# EAGLE board PGA-103+ LNA (EAGLE 7.7.0)
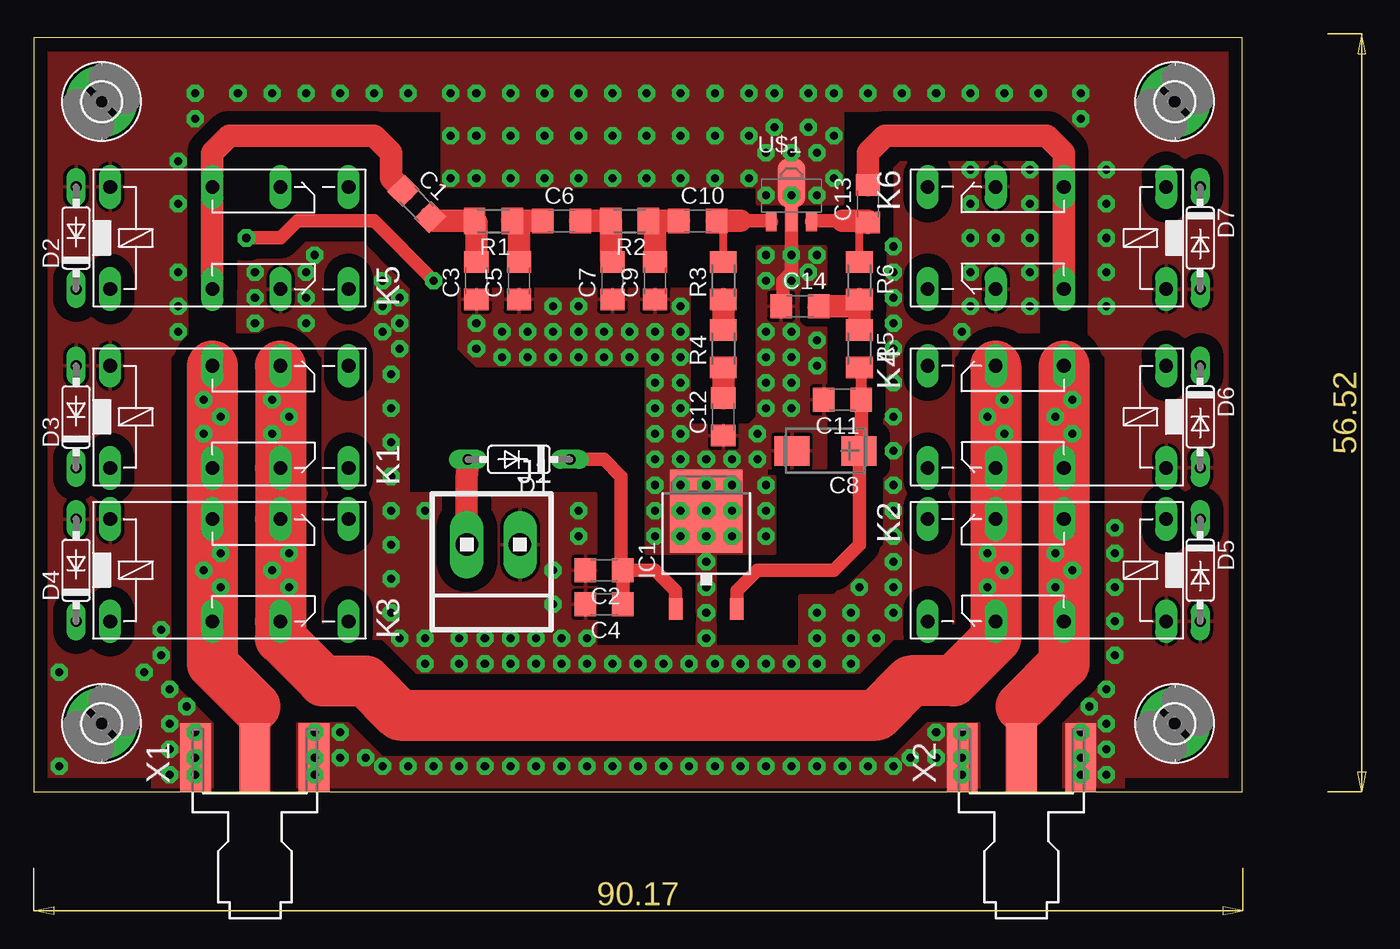
[diagram p0: board, top side]
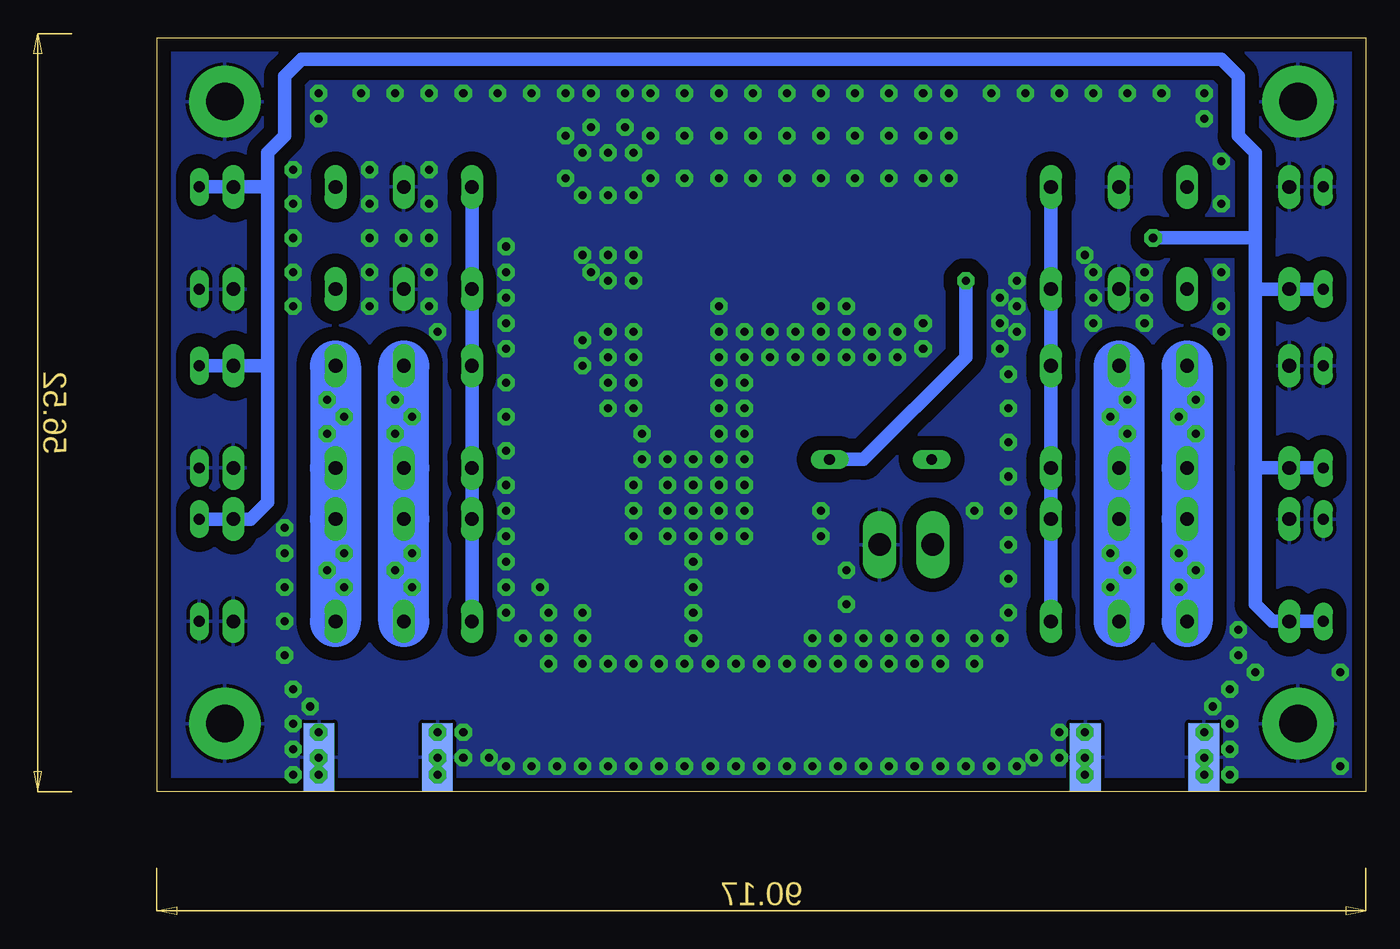
[diagram p1: board, bottom side, seen from below]

Size 90.15 x 56.19 mm. Coordinates in mm from the lower left corner, seen from the top.
Outline: 0,0 90.15,0 90.15,56.19 0,56.19 0,0
Copper layers (1*16): Top 0.035mm / dielectric 1.5mm / Bottom 0.035mm
Design rules "SparkFun": minimum track width 8mil, minimum drill 20mil, track to track 8mil, track to pad 8mil, pad to pad 8mil, via to via 8mil, smd to smd 8mil, copper to edge 10mil, drill to drill 8mil, minimum pad ring 12mil, minimum via ring 10mil, stop-mask expansion 4mil, vias tented up to drill 25mil, thermal gap 10mil

## Footprints (pad centres in the part's own frame; a part is rotated, then mirrored left to right if it is on the bottom)
C1206 = smd 1.6 x 1.8: 1 -1.4,0; 2 1.4,0
CT6032 = smd 2.6 x 2.2: + -2.5,0; - 2.5,0
DO35-7 = drill 0.813 long: A 3.81,0; C -3.81,0
2,8-PAD = drill 2.8 pad 5.334: B2,8 0,0
TO252 = smd 1 x 1.6: 1 -2.28,-4.8; 2 2.28,-4.8 | smd 5.4 x 6.2: 3 0,2.5
1X2MTA = drill 1.676 long: 1 1.981,0; 2 -1.981,0
351 = drill 1.016 long: 1 -3.81,-3.81; 16 -3.81,3.81; O1 8.89,-3.81; O2 8.89,3.81; P1 3.81,-3.81; P2 3.81,3.81; S1 13.97,-3.81; S2 13.97,3.81
M1206 = smd 1.6 x 2: 1 -1.4,0; 2 1.4,0
DF782 = smd 0.8 x 1.9: GND-1 0,-1.727 | smd 2.032 x 3.65: GND-2 0,0.94 | smd 0.8 x 1.4: RF-IN -1.499,-1.981; RF-OUT 1.499,-1.981
J502-ND-142-0701-851/861 = smd 5.08 x 2.286: 1 2.565,0; G@1 2.565,4.42; G@2 2.565,-4.42 | smd 5.08 x 2.286 bottom: G@3 2.565,4.42; G@4 2.565,-4.42

## Placement (x,y rotation side)
C1  10n  [C1206]  28.57,43.81 315 top
C2  1n  [C1206]  42.55,16.51 180 top
C3  330p  [C1206]  33.02,38.1 90 top
C4  1n  [C1206]  42.55,13.97 180 top
C5  330p  [C1206]  36.2,38.1 90 top
C6  10n  [C1206]  39.37,42.55 0 top
C7  330p  [C1206]  43.18,38.1 90 top
C8  10u  [CT6032]  59.05,25.4 180 top
C9  330p  [C1206]  46.35,38.1 90 top
C10  10n  [C1206]  49.53,42.55 0 top
C11  1n  [C1206]  60.33,29.21 180 top
C12  330p  [C1206]  51.44,27.94 90 top
C13  10n  [C1206]  62.23,43.81 90 top
C14  1n  [C1206]  57.15,36.2 0 top
D1  1N4xxx  [DO35-7]  36.2,24.77 180 top
D2  1N4xxx  [DO35-7]  3.17,41.27 90 top
D3  1N4xxx  [DO35-7]  3.17,27.94 90 top
D4  1N4xxx  [DO35-7]  3.17,16.51 90 top
D5  1N4xxx  [DO35-7]  87,16.51 270 top
D6  1N4xxx  [DO35-7]  87,27.94 270 top
D7  1N4xxx  [DO35-7]  87,41.27 270 top
H1  MOUNT-PAD  [2,8-PAD]  5.08,5.08 0 top
H2  MOUNT-PAD  [2,8-PAD]  85.09,5.08 0 top
H3  MOUNT-PAD  [2,8-PAD]  5.08,51.44 0 top
H4  MOUNT-PAD  [2,8-PAD]  85.09,51.44 0 top
IC1  7805DT  [TO252]  50.16,18.41 0 top
J1  [1X2MTA]  34.29,18.41 180 top
K1  351  [351]  9.53,27.94 0 top
K2  351  [351]  80.64,16.51 180 top
K3  351  [351]  9.53,16.51 0 top
K4  351  [351]  80.64,27.94 180 top
K5  351  [351]  9.53,41.27 0 top
K6  351  [351]  80.64,41.27 180 top
R1  1u  [M1206]  34.29,42.55 180 top
R2  1u  [M1206]  44.45,42.55 180 top
R3  1u  [M1206]  51.44,38.1 90 top
R4  150  [M1206]  51.44,33.02 90 top
R5  22  [M1206]  61.59,33.02 270 top
R6  1u  [M1206]  61.59,38.1 270 top
U$1  PGA-103  [DF782]  56.52,44.45 0 top
X1  SMA  [J502-ND-142-0701-851/861]  16.51,0 90 top
X2  SMA  [J502-ND-142-0701-851/861]  73.66,0 90 top

## Library data of the parts
C1-C14 R1-R6 = rcl
D1-D7 = diode
H1-H4 = holes
IC1 = linear
J1 = con-amp
K1-K6 = relay; OC_FARNELL: unknown; OC_NEWARK: unknown
U$1 = minicircuits
X1 X2 = con-coax; MF: JOHNSON COMPONENTS; MPN: 142-0701-851; OC_FARNELL: 1019325; OC_NEWARK: 99F6798

## Nets
ANT: K1.P1 K1.P2 K3.P1 K3.P2 X1.1
GND: C2.2 C3.1 C4.2 C5.1 C7.1 C8.- C9.1 C11.2 C12.1 C14.1 D2.A D3.A D4.A D5.A D6.A D7.A H1.B2,8 H2.B2,8 H3.B2,8 H4.B2,8 IC1.3 J1.2 K1.16 K2.16 K3.16 K4.16 K5.16 K5.O1 K5.O2 K6.16 K6.O1 K6.O2 U$1.GND-1 U$1.GND-2 X1.G@1 X1.G@2 X1.G@3 X1.G@4 X2.G@1 X2.G@2 X2.G@3 X2.G@4
LNA_IN: C1.1 K5.P1 K5.P2
LNA_OUT: C13.2 K6.P1 K6.P2
N$1: C10.2 R3.2 U$1.RF-IN
N$3: C13.1 R6.1 U$1.RF-OUT
N$5: C8.+ C11.1 IC1.2 R5.2
N$7: D1.A J1.1
N$8: C9.2 C10.1 R2.1
N$9: C14.2 R5.1 R6.2
N$10: R3.1 R4.2
N$11: C12.2 R4.1
N$12: C6.2 C7.2 R2.2
N$13: C5.2 C6.1 R1.1
N$14: C1.2 C3.2 R1.2
N$16: K1.S1 K1.S2 K3.S1 K3.S2 K5.S1 K5.S2
N$17: K2.S1 K2.S2 K4.S1 K4.S2 K6.S1 K6.S2
RF_BYPASS: K1.O1 K1.O2 K2.O1 K2.O2 K3.O1 K3.O2 K4.O1 K4.O2
TRX: K2.P1 K2.P2 K4.P1 K4.P2 X2.1
VCC: C2.1 C4.1 D1.C D2.C D3.C D4.C D5.C D6.C D7.C IC1.1 K1.1 K2.1 K3.1 K4.1 K5.1 K6.1

## Tracks (layer width: path | path; a pad name or v marks a point on that pad's centre or on a via)
ANT  (via drill 0.6 pad 1.27)
  Top 2.184: 16.51,6.35 X1.1
  Top 3.81: K1.P2 K1.P1 K3.P2 K3.P1 13.34,9.53 16.51,6.35
  Bottom 1.016: K1.P2 v12.7,29.21 v13.97,27.94 v12.7,26.67 | K3.P2 v13.97,17.78 v12.7,16.51 v13.97,15.24
  Bottom 3.81: K1.P2 K1.P1 K3.P2 K3.P1
GND  (via drill 0.6 pad 1.27)
  Top 1.016: U$1.GND-2 U$1.GND-1 56.52,38.73 55.88,38.1 55.88,36.96 C14.1
  other vias: 29.21,20.95 22.86,4.45 22.86,2.54 24.77,2.54 26.04,1.91 27.94,1.91 29.84,1.91 31.75,1.91 33.66,1.91 35.56,1.91 37.47,1.91 39.37,1.91 41.27,1.91 43.18,1.91 45.09,1.91 46.99,1.91 48.9,1.91 50.8,1.91 52.7,1.91 54.61,1.91 56.52,1.91 58.42,1.91 60.33,1.91 62.23,1.91 64.14,1.91 67.31,4.45 67.31,2.54 65.41,2.54 11.43,6.35 10.16,5.08 10.16,3.17 10.16,1.27 78.74,6.35 80.01,5.08 80.01,3.17 80.01,1.27 80.01,7.62 10.16,7.62 1.91,8.89 8.26,8.89 9.53,10.16 1.91,1.91 26.67,20.95 26.67,18.41 26.67,15.88 26.67,13.34 27.3,11.43 29.21,9.53 31.75,9.53 33.66,9.53 35.56,9.53 37.47,9.53 39.37,9.53 41.27,9.53 43.18,9.53 45.09,9.53 46.99,9.53 48.9,9.53 50.8,9.53 52.7,9.53 54.61,9.53 56.52,9.53 58.42,9.53 60.96,9.53 62.87,11.43 64.14,13.34 58.42,13.34 60.96,13.34 50.16,11.43 50.16,13.34 50.16,17.14 48.26,19.05 52.07,19.05 52.07,20.95 48.26,20.95 50.16,19.05 48.26,22.86 52.07,22.86 50.16,22.86 50.16,20.95 40.64,20.95 40.64,19.05 41.27,11.43 38.73,13.97 38.73,16.51 50.16,24.77 56.52,30.48 56.52,32.38 54.61,20.95 54.61,19.05 38.73,34.29 40.64,34.29 42.55,34.29 44.45,34.29 46.35,34.29 48.26,34.29 42.55,32.38 44.45,32.38 46.35,32.38 48.26,32.38 38.73,36.2 40.64,36.2 38.73,32.38 40.64,32.38 54.61,40.01 56.52,40.01 54.61,34.29 58.42,33.66 58.42,31.75 54.61,32.38 56.52,34.29 54.61,30.48 33.02,45.72 35.56,45.72 38.1,45.72 40.64,45.72 43.18,45.72 45.72,45.72 48.26,45.72 50.8,45.72 53.34,45.72 54.61,44.45 58.42,44.45 58.42,47.62 54.61,47.62 59.69,45.72 57.78,52.07 59.69,52.07 62.23,52.07 64.77,52.07 67.31,52.07 69.85,52.07 72.39,52.07 74.93,52.07 78.11,52.07 80.01,46.35 80.01,43.81 80.01,41.27 80.01,38.73 80.01,36.2 78.11,50.16 80.64,10.16 80.64,12.7 80.64,15.24 80.64,17.78 80.64,19.68 9.53,12.06 10.79,34.29 10.79,36.2 10.79,38.73 10.79,43.81 10.79,46.99 12.06,50.16 12.06,52.07 15.24,52.07 17.78,52.07 20.32,52.07 22.86,52.07 25.4,52.07 27.94,52.07 31.11,52.07 31.11,48.9 33.02,48.9 35.56,48.9 38.1,48.9 40.64,48.9 43.18,48.9 45.72,48.9 48.26,48.9 50.8,48.9 53.34,48.9 55.24,49.53 57.78,49.53 59.69,48.9 56.52,47.62 56.52,44.45 36.83,34.29 36.83,32.38 34.92,34.29 34.92,32.38 48.26,26.67 48.26,30.48 48.26,28.57 46.35,28.57 46.35,30.48 46.35,26.67 46.35,22.86 46.35,20.95 31.75,11.43 33.66,11.43 35.56,11.43 37.47,11.43 39.37,11.43 29.21,11.43 58.42,11.43 60.96,11.43 58.42,40.01 56.52,28.57 54.61,28.57 54.61,38.1 56.52,38.1 57.78,38.73 12.06,4.45 12.06,2.54 12.06,1.27 20.95,1.27 20.95,2.54 20.95,4.45 78.11,4.45 69.22,4.45 69.22,2.54 78.11,2.54 78.11,1.27 69.22,1.27 33.02,34.92 33.02,33.02 31.11,45.72 26.67,23.5 26.67,26.04 26.67,28.57 26.67,31.11 27.3,33.02 27.3,34.92 16.51,34.92 20.32,34.92 20.32,38.73 20.32,36.83 16.51,38.73 16.51,36.83 64.14,15.24 64.14,17.14 61.59,15.24 74.3,46.35 74.3,43.81 74.3,41.27 74.3,38.73 74.3,36.2 69.85,36.2 69.85,38.73 69.85,41.27 71.75,41.27 69.85,43.81 69.85,46.35 64.14,19.05 64.14,20.95 64.14,22.86 64.14,27.94 64.14,30.48 64.14,33.02 64.14,34.92 64.14,36.83 64.14,38.73 64.14,25.4 33.02,52.07 35.56,52.07 38.1,52.07 40.64,52.07 43.18,52.07 45.72,52.07 48.26,52.07 50.8,52.07 53.34,52.07 55.24,52.07 48.26,36.2 48.26,24.77 46.35,24.77 54.61,22.86 52.07,24.77 53.98,24.77 53.98,26.67 64.14,40.64 69.22,34.29 26.04,36.2 26.04,34.29 20.95,40.01 26.04,38.1 27.3,36.83 46.35,19.05 50.16,15.24
  pour Bottom (isolate 1.016): 0,55.88 90.17,55.88 90.17,0 0,0
  pour Top (isolate 1.016): 0,0 10.16,0 10.16,32.38 11.43,33.66 11.43,48.26 13.97,50.8 76.2,50.8 78.74,48.26 78.74,33.66 80.01,32.38 80.01,0 90.17,0 90.17,55.88 0,55.88
  pour Top (isolate 1.016): 15.24,41.91 23.5,41.91 27.94,37.47 27.94,22.23 41.91,22.23 41.91,10.79 49.53,10.79 49.53,15.24 50.8,15.24 50.8,10.79 57.15,10.79 57.15,14.61 59.69,14.61 63.5,18.41 63.5,40.64 64.14,41.27 64.14,46.35 64.77,46.99 74.3,46.99 74.93,46.35 74.93,34.29 70.48,34.29 68.58,32.38 68.58,12.06 67.94,11.43 64.14,11.43 61.59,8.89 28.57,8.89 26.04,11.43 22.23,11.43 21.59,12.06 21.59,32.38 19.68,34.29 15.24,34.29
  pour Top (no thermals): 30.48,45.09 53.98,45.09 53.98,43.81 60.33,43.81 60.33,50.8 30.48,50.8
  pour Top (isolate 0.61): 53.98,40.64 59.05,40.64 59.05,24.13 45.72,24.13 45.72,31.75 33.02,31.75 31.75,33.02 31.75,37.47 48.9,37.47 48.9,27.3 53.34,27.3 53.98,27.94
  pour Top (no thermals): 45.72,24.13 54.61,24.13 54.61,23.5 55.24,23.5 55.24,17.78 50.8,17.78 50.8,13.34 49.53,13.34 49.53,17.78 45.72,17.78
  pour Top (no thermals): 19.68,5.08 23.5,5.08 26.04,2.54 64.14,2.54 66.67,5.08 70.48,5.08 70.48,0 19.68,0
  pour Top (no thermals): 76.83,5.08 80.01,8.26 81.28,8.26 81.28,0 76.83,0
  pour Top (no thermals): 13.34,0 13.34,5.08 10.16,8.26 8.89,8.26 8.89,0
LNA_IN
  Top 1.676: K5.P1 K5.P2 13.34,47.62 14.61,48.9 25.4,48.9 26.67,47.62 26.67,45.72 C1.1
LNA_OUT
  Top 1.676: 76.83,36.83 K6.P2 K6.P1 76.83,46.99 76.83,47.62 75.56,48.9 63.5,48.9 62.23,47.62 C13.2
N$1
  Top 0.61: R3.2 51.44,42.55
  Top 1.016: 52.7,42.55 54.94,42.55 U$1.RF-IN
  Top 1.676: C10.2 51.44,42.55 52.7,42.55
N$3
  Top 0.61: R6.1 61.59,42.55
  Top 1.016: 60.33,42.55 58.09,42.55 U$1.RF-OUT
  Top 1.676: C13.1 62.23,42.55 61.59,42.55 60.33,42.55
N$5
  Top 0.813: C11.1 61.73,31.49 R5.2
  Top 1.016: IC1.2 52.45,14.98 53.98,16.51 59.69,16.51 61.59,18.41 61.59,25.36 C8.+ 61.73,25.57 C11.1
N$7
  Top 0.61: 32.38,24.13 D1.A
  Top 1.016: 32.31,24.69 D1.A
  Top 1.676: J1.1 32.31,23.42 32.38,24.13
N$8
  Top 1.676: R2.1 46.35,42.55 | 46.35,42.55 C10.1 | C9.2 46.35,42.55
N$9
  Top 1.676: R6.2 61.59,36.2 | 61.59,36.2 R5.1 | C14.2 61.59,36.2
N$10
  Top 1.676: R3.1 R4.2
N$11
  Top 1.676: R4.1 C12.2
N$12
  Top 1.676: C6.2 R2.2 43.05,39.63 C7.2
N$13
  Top 1.676: R1.1 36.2,42.55 | 36.2,42.55 C6.1 | C5.2 36.2,42.55
N$14
  Top 1.676: C3.2 33.02,42.41 R1.2 29.84,42.55 C1.2
N$16
  Bottom 1.016: K5.S2 K5.S1 K1.S2 | 23.5,31.11 K1.S2 | K1.S2 K1.S1 K3.S2 K3.S1
N$17
  Bottom 1.016: K2.S2 K2.S1 K4.S2 K4.S1 K6.S2 K6.S1
RF_BYPASS  (via drill 0.6 pad 1.27)
  Top 3.81: K3.O1 K3.O2 K1.O1 K1.O2 K3.O1 | K3.O1 18.41,11.43 21.59,8.26 24.77,8.26 27.3,5.71 62.87,5.71 65.41,8.26 68.58,8.26 71.75,11.43 K2.O2 K2.O1 K4.O2 K4.O1
  Bottom 1.016: K1.O2 v17.78,29.21 v19.05,27.94 v17.78,26.67 | K3.O2 v19.05,17.78 v17.78,16.51 v19.05,15.24 | K4.O1 v72.39,29.21 v71.12,27.94 v72.39,26.67 | K2.O1 v71.12,17.78 v72.39,16.51 v71.12,15.24
  Bottom 3.81: K1.O2 K1.O1 K3.O2 K3.O1 | K2.O2 K2.O1 K4.O2 K4.O1
TRX  (via drill 0.6 pad 1.27)
  Top 2.184: 73.66,6.35 X2.1
  Top 3.81: K4.P1 K4.P2 K2.P1 K2.P2 76.83,9.53 73.66,6.35
  Bottom 1.016: K4.P1 v77.47,29.21 v76.2,27.94 v77.47,26.67 | K2.P1 v76.2,17.78 v77.47,16.51 v76.2,15.24
  Bottom 3.81: K4.P1 K4.P2 K2.P1 K2.P2
VCC  (via drill 0.6 pad 1.27)
  Top 1.016: D1.C 42.55,24.77 43.81,23.5 43.81,16.64 C2.1 | C2.1 C4.1 | IC1.1 47.88,14.98 46.35,16.51 C2.1 | v15.88,41.27 18.41,41.27 19.68,42.55 25.4,42.55 v29.84,38.1
  Bottom 1.016: D2.C K5.1 8.26,37.47 | 8.26,37.47 8.26,24.13 | 8.26,24.13 8.26,13.97 6.99,12.7 K3.1 D4.C | D3.C K1.1 8.26,24.13 | D7.C K6.1 81.92,45.09 | K4.1 D6.C 81.92,31.75 | 81.92,31.75 81.92,45.09 | D5.C K2.1 83.19,20.32 81.92,21.59 81.92,31.75 | 81.92,45.09 81.92,47.62 80.64,48.9 80.64,53.34 79.38,54.61 10.79,54.61 9.53,53.34 9.53,48.9 8.26,47.62 8.26,41.27 | 8.26,37.47 8.26,41.27 | 8.26,41.27 v15.88,41.27 | v29.84,38.1 29.84,32.38 37.47,24.77 D1.C